# EAGLE board A04 (EAGLE 9.7.0)

Size 148.8 x 69.44 mm. Coordinates in mm from the lower left corner, seen from the top.
Outline: 0,0 148.8,0 148.8,69.44 0,69.44 0,0
Copper layers (1*16): Top 0.035mm / dielectric 1.5mm / Bottom 0.035mm
Design rules "default": minimum track width 6mil, minimum drill 0.35mm, track to track 6mil, track to pad 6mil, pad to pad 6mil, via to via 6mil, smd to smd 6mil, copper to edge 40mil, drill to drill 6mil, minimum pad ring 10mil, minimum via ring 8mil, stop-mask expansion 4mil, vias tented up to drill 0mil, thermal gap 10mil

## Footprints (pad centres in the part's own frame; a part is rotated, then mirrored left to right if it is on the bottom)
7SEG-13 = drill 0.813 long: 1 -5.08,-7.62; 2 -2.54,-7.62; 3 0,-7.62; 4 2.54,-7.62; 5 5.08,-7.62; 6 5.08,7.62; 7 2.54,7.62; 8 0,7.62; 9 -2.54,7.62; 10 -5.08,7.62
BATTERY-GENERIC = drill 1.118 pad 3.15 octagon: + 2.54,0; - -2.54,0
RESAD1016W63L850D250B = drill 0.83 pad 1.43: 1 -5.08,0; 2 5.08,0
78B04ST = drill 0.8: 1 -3.81,-3.81; 2 -1.27,-3.81; 3 1.27,-3.81; 4 3.81,-3.81; 5 3.81,3.81; 6 1.27,3.81; 7 -1.27,3.81; 8 -3.81,3.81
DIP762W53P254L1969H508Q16B = drill 0.743 pad 1.343: 1 -3.81,8.89; 2 -3.81,6.35; 3 -3.81,3.81; 4 -3.81,1.27; 5 -3.81,-1.27; 6 -3.81,-3.81; 7 -3.81,-6.35; 8 -3.81,-8.89; 9 3.81,-8.89; 10 3.81,-6.35; 11 3.81,-3.81; 12 3.81,-1.27; 13 3.81,1.27; 14 3.81,3.81; 15 3.81,6.35; 16 3.81,8.89

## Placement (x,y rotation side)
DIGIT1  7SEG-CK  [7SEG-13]  139.53,24.21 0 top
P5V  BATTERYGENERIC  [BATTERY-GENERIC]  8.26,61.18 180 top
R1  10k  [RESAD1016W63L850D250B]  45.55,8.97 90 top
R2  10k  [RESAD1016W63L850D250B]  48.09,8.97 90 top
R3  10k  [RESAD1016W63L850D250B]  43.01,8.97 90 top
R4  330  [RESAD1016W63L850D250B]  103.97,24.21 90 top
R5  10k  [RESAD1016W63L850D250B]  40.47,8.97 90 top
R6  330  [RESAD1016W63L850D250B]  139.53,44.53 90 top
R7  330  [RESAD1016W63L850D250B]  106.51,24.21 90 top
R8  330  [RESAD1016W63L850D250B]  109.05,24.21 90 top
R9  330  [RESAD1016W63L850D250B]  111.59,24.21 90 top
R10  330  [RESAD1016W63L850D250B]  114.13,24.21 90 top
R11  330  [RESAD1016W63L850D250B]  116.67,24.21 90 top
R12  330  [RESAD1016W63L850D250B]  119.21,24.21 90 top
R13  330  [RESAD1016W63L850D250B]  139.53,8.97 90 top
SW1  SPST-478B04ST  [78B04ST]  44.28,25.48 0 top
UCD5411  CD4511_PDIP  [DIP762W53P254L1969H508Q16B]  77.3,25.48 90 top

## Library data of the parts
DIGIT1 = Tinkercad; CATEGORY: Opto-Electronic; SUB-CATEGORY: Display; TYPE: 7-Segment
P5V R1-R13 SW1 UCD5411 = Tinkercad

## Nets
DIGIT1_B: DIGIT1.6 R4.1 R7.1
DIGIT1_C: DIGIT1.4 R8.1
DIGIT1_CK1: DIGIT1.3 R13.2
DIGIT1_CK2: DIGIT1.8 R6.1
DIGIT1_D: DIGIT1.2 R9.1
DIGIT1_E: DIGIT1.1 R10.1
DIGIT1_F: DIGIT1.9 R11.1
DIGIT1_G: DIGIT1.10 R12.1
P5V+: P5V.+ SW1.5 SW1.6 SW1.7 SW1.8 UCD5411.3 UCD5411.4 UCD5411.16
P5V-: P5V.- R1.1 R2.1 R3.1 R5.1 R6.2 R13.1 UCD5411.5 UCD5411.8
UCD5411_A: R4.2 UCD5411.13
UCD5411_B: R7.2 UCD5411.12
UCD5411_C: R8.2 UCD5411.11
UCD5411_D: R9.2 UCD5411.10
UCD5411_E: R10.2 UCD5411.9
UCD5411_F: R11.2 UCD5411.15
UCD5411_G: R12.2 UCD5411.14
UCD5411_IA: R2.2 SW1.4 UCD5411.7
UCD5411_IB: R1.2 SW1.3 UCD5411.1
UCD5411_IC: R3.2 SW1.2 UCD5411.2
UCD5411_ID: R5.2 SW1.1 UCD5411.6

## Tracks (layer width: path | path; a pad name or v marks a point on that pad's centre or on a via)
DIGIT1_B  (2 unrouted)
DIGIT1_C  (1 unrouted)
DIGIT1_CK1  (1 unrouted)
DIGIT1_CK2  (1 unrouted)
DIGIT1_D  (1 unrouted)
DIGIT1_E  (1 unrouted)
DIGIT1_F  (1 unrouted)
DIGIT1_G  (1 unrouted)
P5V+  (7 unrouted)
P5V-  (8 unrouted)
UCD5411_A  (1 unrouted)
UCD5411_B  (1 unrouted)
UCD5411_C  (1 unrouted)
UCD5411_D  (1 unrouted)
UCD5411_E  (1 unrouted)
UCD5411_F  (1 unrouted)
UCD5411_G  (1 unrouted)
UCD5411_IA  (2 unrouted)
UCD5411_IB  (2 unrouted)
UCD5411_IC  (2 unrouted)
UCD5411_ID  (2 unrouted)